# Altium PCB UAC.PcbDoc
Units mm, origin at the board's own origin, x right, y up, seen from the top; angles counter-clockwise.
Board outline 27.3 x 30.48 mm, 2 copper layers (Top Layer, Bottom Layer), stack 1.57 mm thick; 29 components, 25 nets, 197 pads, 47 vias.
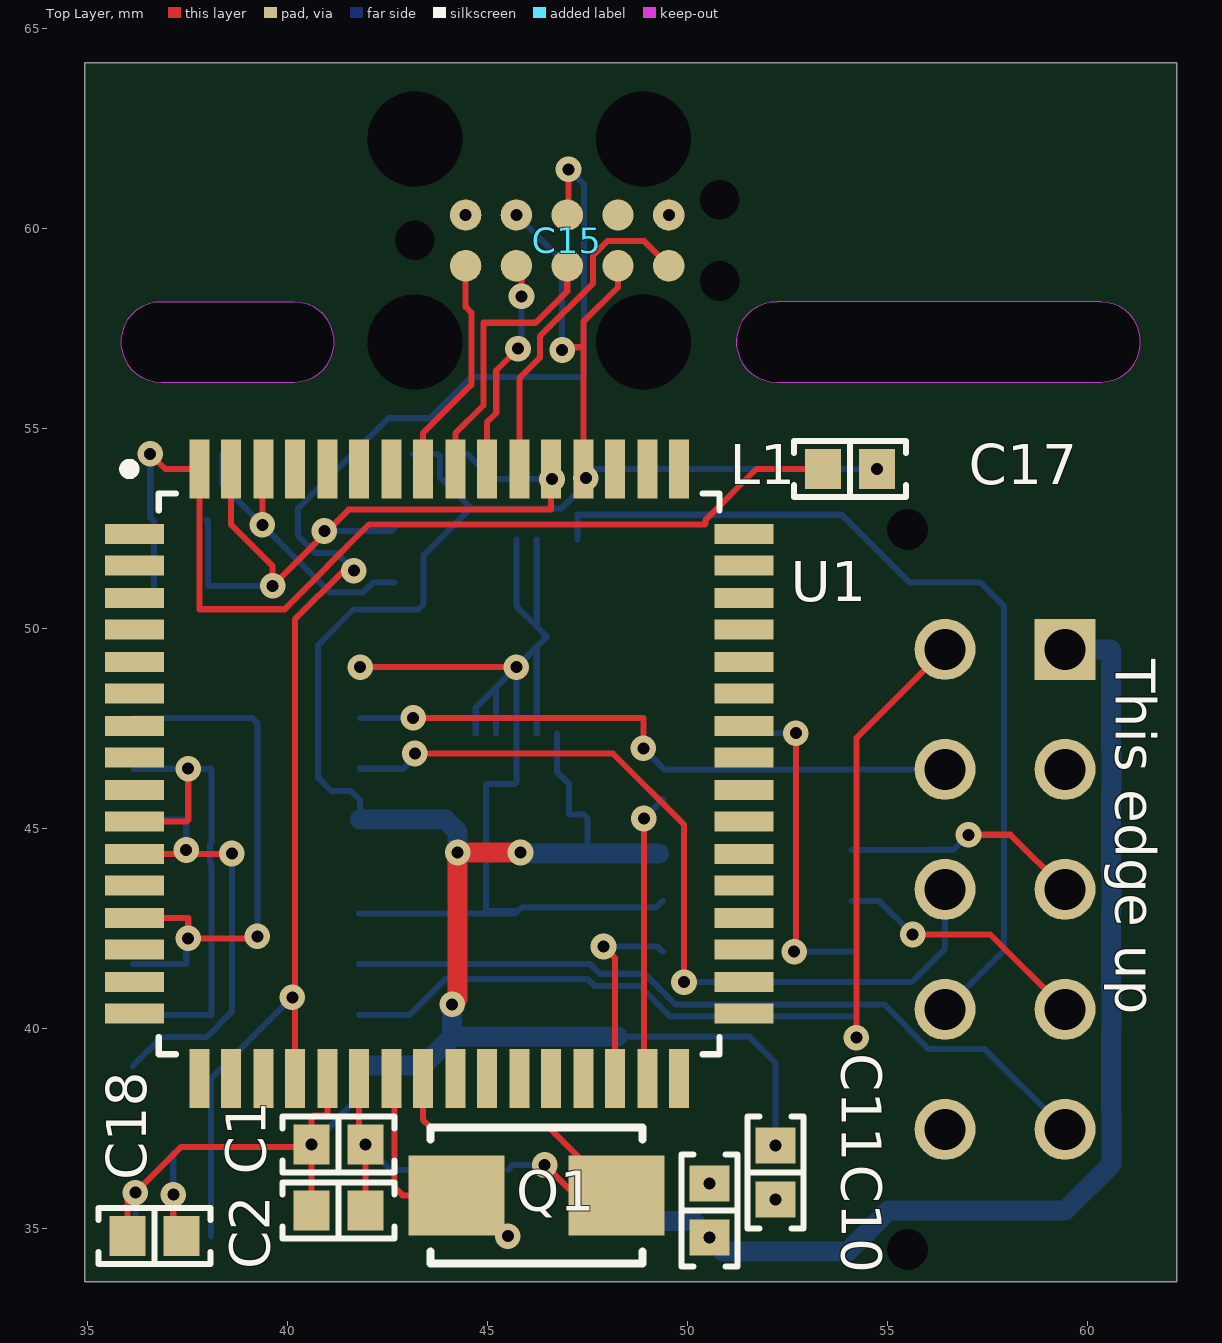
[diagram p0: Top Layer view]
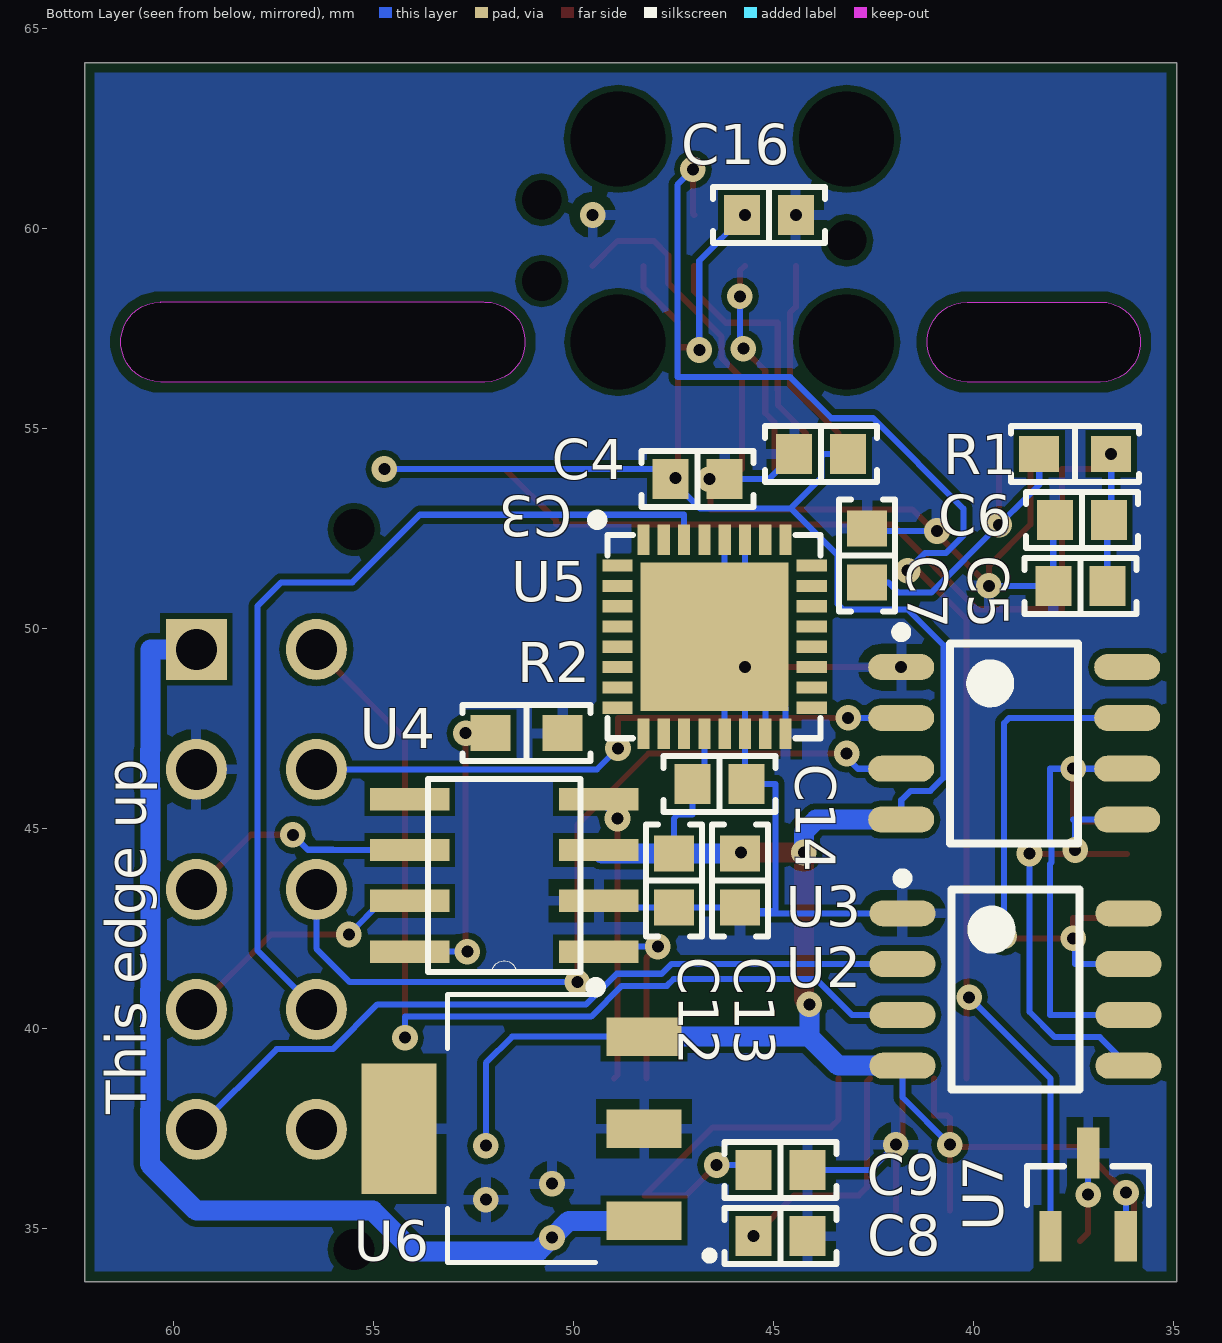
[diagram p1: Bottom Layer view, seen from below]
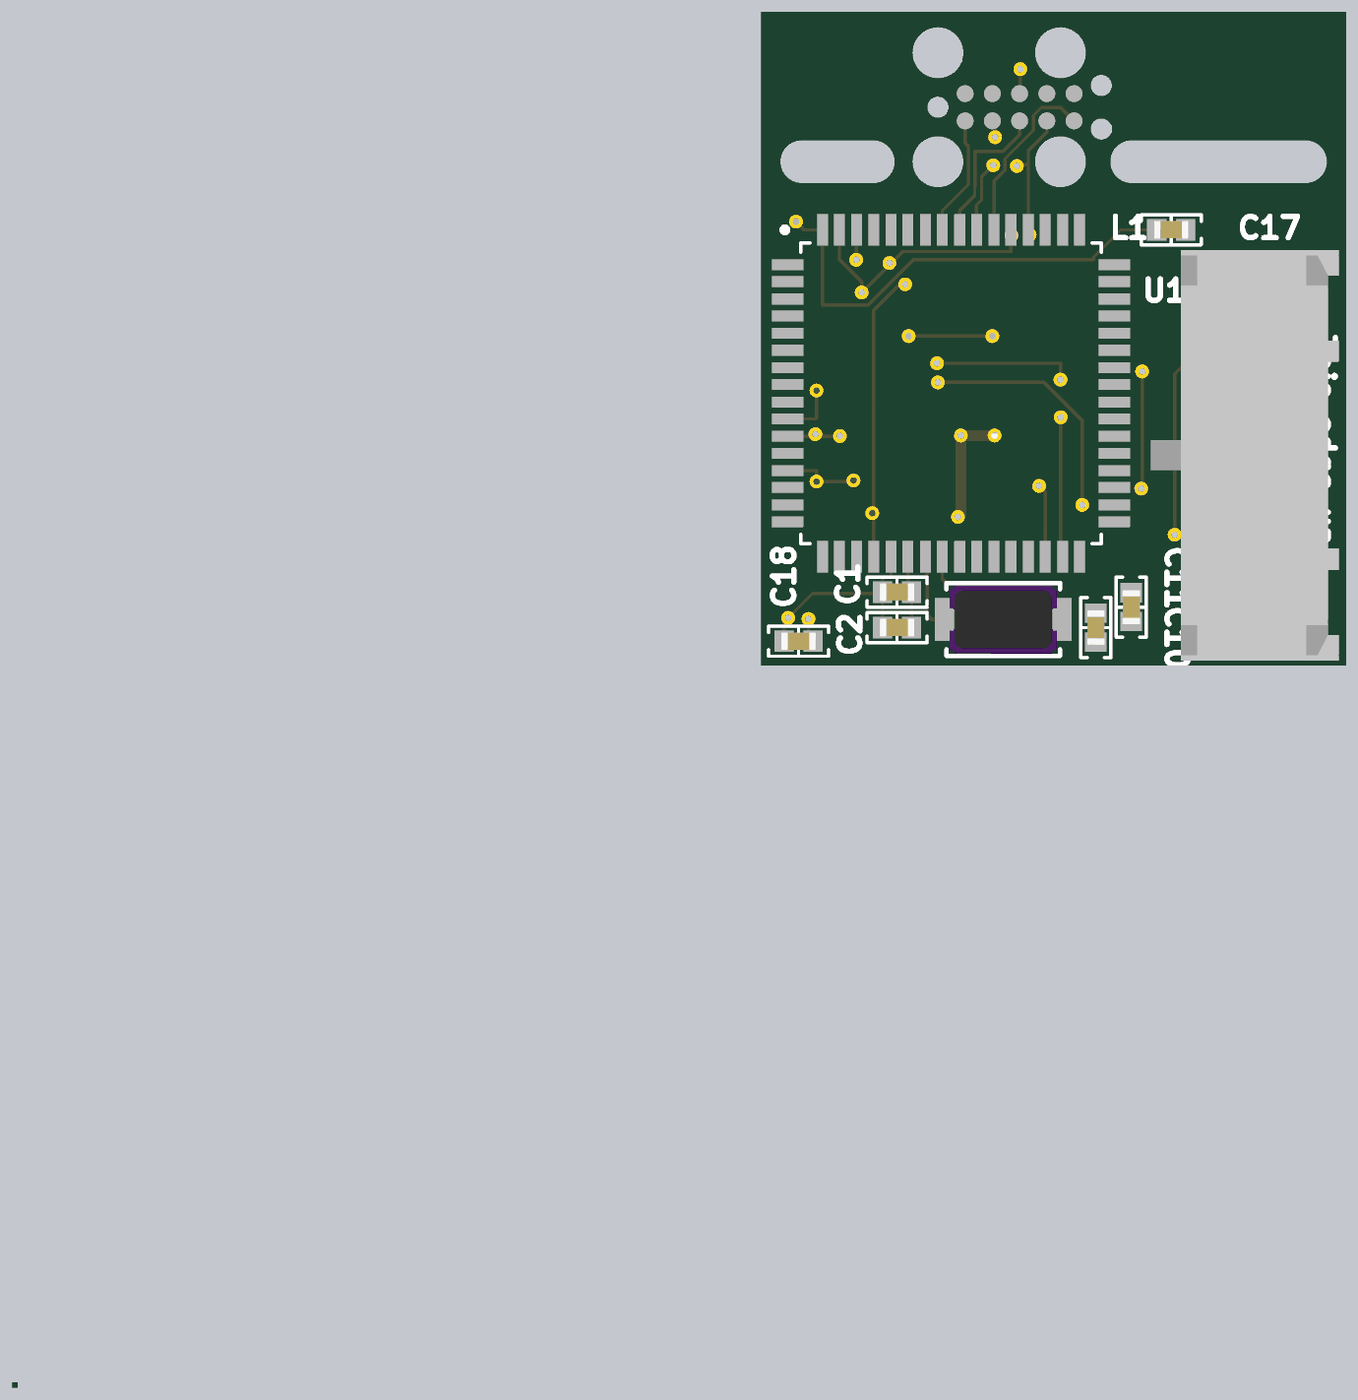
[diagram p2: 3D render of the assembled board from above, using the file's embedded part models]
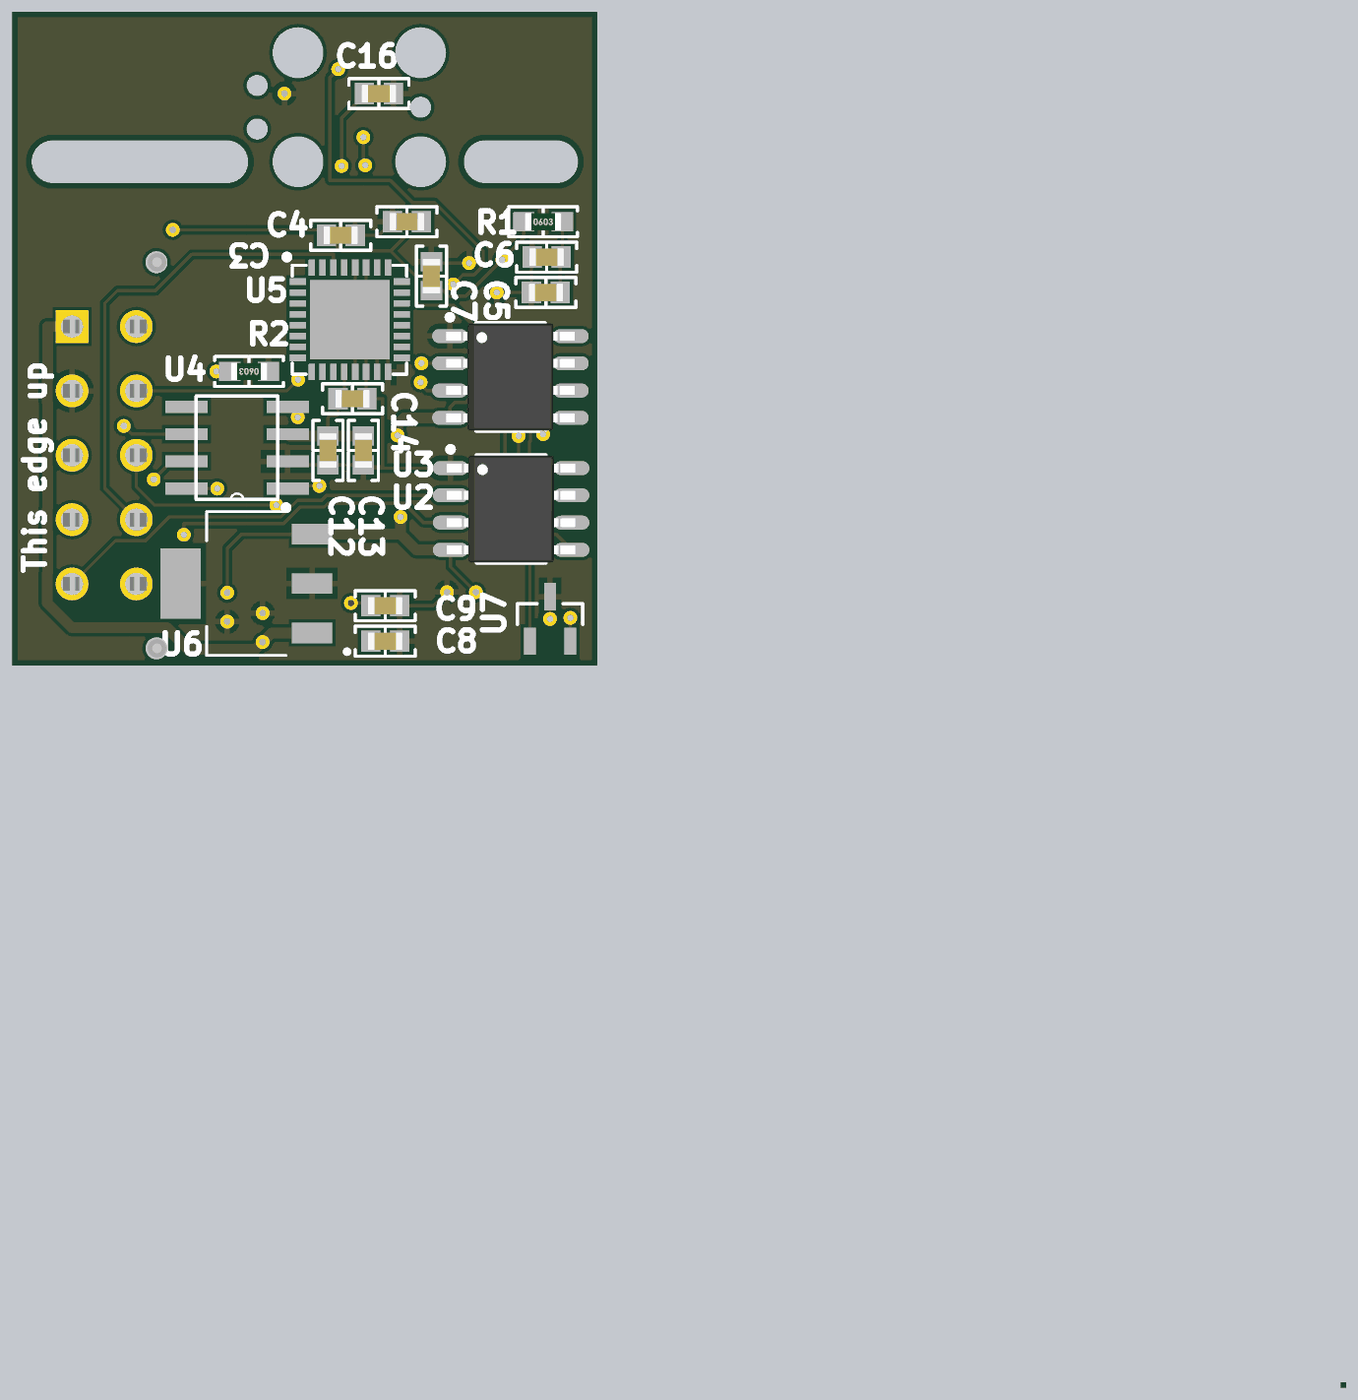
[diagram p3: 3D render of the assembled board from below, using the file's embedded part models]

## Layer stack, top to bottom
Top Solder: solder mask 0.015, Solder Resist, Dk 3.5
Top Layer: signal copper 0.035
Dielectric 1: dielectric 1.5, FR-4, Dk 4.8
Bottom Layer: signal copper 0.035
Bottom Solder: solder mask 0.015, Solder Resist, Dk 3.5

## Board outline
34.925,33.655 34.925,64.135 62.23,64.135 62.23,33.655
cut-out: 36.839,56.15 40.165,56.15 ccw(c40.165,57.15) 40.165,58.15 36.842,58.15 ccw(c36.83,57.15)
cut-out: 52.226,56.15 60.325,56.15 ccw(c60.325,57.15) 60.325,58.15 60.325,58.151 52.246,58.151 52.229,58.15 ccw(c52.217,57.15)
cut-out: 0,0 0.254,0 0.254,0.254 0,0.254

## Design rules (kind name [scope] priority, off if disabled: settings)
AcuteAngle [All] p1: minimum=4.50000000000000E+0001 checktracksonly=FALSE
BoardOutlineClearance [All] p1: gap=0.254 ignorepadtopadclearanceinfootprint=FALSE
Clearance [All] p1: gap=0.152 ignorepadtopadclearanceinfootprint=FALSE
ComponentClearance [All] p1: gap=0.1 collisioncheckmode=3 verticalgap=0.254 showdistances=FALSE
FanoutControl Fanout_Small [All] p1 off: bgadir=Out bgaviamode=Centered fanoutstyle=Auto fanoutdirection=Alternating viagrid=0.025 // Protel DXP Scope 1 Expression Was: (CompPinCount < 5)   Fanout_Small (Default Rule)
FanoutControl Fanout_Default [All] p2: bgadir=Out bgaviamode=Centered fanoutstyle=Auto fanoutdirection=Alternating viagrid=0.025 // Fanout_Default (Default Rule)
FanoutControl Fanout_SOIC [All] p3 off: bgadir=Out bgaviamode=Centered fanoutstyle=Auto fanoutdirection=Alternating viagrid=0.025 // Protel DXP Scope 1 Expression Was: IsSOIC   Fanout_SOIC (Default Rule)
FanoutControl Fanout_BGA [All] p4 off: bgadir=Out bgaviamode=Centered fanoutstyle=Auto fanoutdirection=Alternating viagrid=0.025 // Protel DXP Scope 1 Expression Was: IsBGA   Fanout_BGA (Default Rule)
FanoutControl Fanout_LCC [All] p5 off: bgadir=Out bgaviamode=Centered fanoutstyle=Auto fanoutdirection=Alternating viagrid=0.025 // Protel DXP Scope 1 Expression Was: IsLCC   Fanout_LCC (Default Rule)
HoleSize [All] p1: absolutevalues=TRUE maxlimit=7 minlimit=0.2 maxpercent=80.000 minpercent=20.000
MinimumAnnularRing [All] p1: minimumring=0.17
PolygonConnect [All] p1: connectstyle=Relief reliefconductorwidth=0.254 reliefentries=4 polygonreliefangle="90 Angle" airgapwidth=0.254
RoutingVias [All] p1: holewidth=0.3 width=0.64 viastyle="Through Hole" minholewidth=0.3 minwidth=0.61 maxholewidth=0.711 maxwidth=1.27
SMDEntry [All] p1 off: side=TRUE corner=TRUE anyangle=FALSE // Protel DXP Scope 1 Expression Was: not IsRoundPad
SMDToCorner [All] p1: distance=60000
SilkToSolderMaskClearance [All] p1 off: minsilkscreentomaskgap=0.254 clearancetoexposedcopper=TRUE // Protel DXP Scope 1 Expression Was: IsPad
SolderMaskExpansion [All] p1: expansion=0
Width [All] p1: maxlimit=1.219 minlimit=0.152 preferedwidth=0.305
22 further rules are at their usual default settings.

## Components (designator, comment, footprint, x,y, rotation, side; value= is the part's Value field where it differs from the comment)
C1 "SMD Capacitor" "CAP 0603/1608" 41.275,37.084 r180 top value=1uF
C2 "SMD Capacitor" "CAP 0603/1608" 41.275,35.433 r180 top value=100nF
C3 "SMD Capacitor" "CAP 0603/1608" 46.903,53.721 r0 bottom value=1uF
C4 "SMD Capacitor" "CAP 0603/1608" 43.815,54.355 r180 bottom value=100nF
C5 "SMD Capacitor" "CAP 0603/1608" 37.338,51.054 r0 bottom value=1uF
C6 "SMD Capacitor" "CAP 0603/1608" 37.298,52.704 r0 bottom value=100nF
C7 "SMD Capacitor" "CAP 0603/1608" 42.672,51.816 r90 bottom value=1uF
C8 "SMD Capacitor" "CAP 0603/1608" 44.831,34.798 r0 bottom value=18pF
C9 "SMD Capacitor" "CAP 0603/1608" 44.831,36.449 r0 bottom value=18pF
C10 "SMD Capacitor" "CAP 0603/1608" 50.546,35.433 r270 top value=2u2
C11 "SMD Capacitor" "CAP 0603/1608" 52.197,36.384 r90 top value=1uF
C12 "SMD Capacitor" "CAP 0603/1608" 47.498,43.688 r90 bottom value=100nF
C13 "SMD Capacitor" "CAP 0603/1608" 45.847,43.688 r90 bottom value=1uF
C14 "SMD Capacitor" "CAP 0603/1608" 46.355,46.101 r180 bottom value=1uF
C15 "JTAG" SEGGER_10_PIN 43.18,59.69 r0 top
C16 "SMD Capacitor" "CAP 0603/1608" 45.125,60.325 r180 bottom value=100nF
C17 "43045-1012" 43045-1012 59.436,43.465 r90 top
C18 "SMD Capacitor" "CAP 0603/1608" 36.679,34.799 r0 top value=1uF
L1 "SMD Capacitor" "CAP 0603/1608" 54.062,53.975 r0 top value=100nH
Q1 "16M" "NDK NX5032GA" 46.228,35.814 r180 top
R1 "SMD Resistor" "STACKPOLE CSR0603" 37.465,54.355 r180 bottom value=100
R2 "SMD Resistor" "STACKPOLE CSR0603" 51.181,47.371 r0 bottom value=10k
U1 "AT90CAN128-16AI" *QFP80P1600X1600X120-64N 43.79,46.355 r0 top
U2 "MAX31855KASA+" SOIC8 38.958,40.962 r180 bottom value=Value
U3 "MAX31855KASA+" SOIC8 38.989,47.117 r180 bottom value=Value
U4 "MCP2551-I/SN" *SOIC127P600X175-8N 51.74,43.815 r0 bottom
U5 "ADXL1001/2" PCBComponent_1 48.908,51.562 r180 bottom
U6 "LT1118CST-5" *SOT230P700X180-4N 51.308,37.484 r0 bottom
U7 "MCP130T-450I/TT" *SOT95P237X112-3N 37.142,35.833 r180 bottom

## Footprints (in the part's own frame and the unit in brackets; to place one, negate y for a bottom-side part, rotate by r counter-clockwise, add the part's x,y. Pads: shape width x height; smd on the part's side, far side on the other; paste and mask are expansions set on the pad)
43045-1012 [mm]
  rect 1.524x1.524 hole 1.02: 1(6,0)
  round 1.524 hole 1.02: 2(3,0) 3(0,0) 4(-3,0) 5(-6,0) 6(6,3) 7(3,3) 8(0,3) 9(-3,3) 10(-6,3)
  round 0 hole 1.02 unplated: ""(-9,3.94) ""(9,3.94)
  body extent -9.58,-2.45 9.58,6.32, height 9.95
*QFP80P1600X1600X120-64N [mil]
  rect 58x20 smd: 1(-300,236) 2(-300,205) 3(-300,173) 4(-300,142) 5(-300,110) 6(-300,79) 7(-300,47) 8(-300,16) 9(-300,-16) 10(-300,-47) 11(-300,-79) 12(-300,-110) 13(-300,-142) 14(-300,-173) 15(-300,-205) 16(-300,-236) 33(300,-236) 34(300,-205) 35(300,-173) 36(300,-142) 37(300,-110) 38(300,-79) 39(300,-47) 40(300,-16) 41(300,16) 42(300,47) 43(300,79) 44(300,110) 45(300,142) 46(300,173) 47(300,205) 48(300,236)
  rect 20x58 smd: 17(-236,-300) 18(-205,-300) 19(-173,-300) 20(-142,-300) 21(-110,-300) 22(-79,-300) 23(-47,-300) 24(-16,-300) 25(16,-300) 26(47,-300) 27(79,-300) 28(110,-300) 29(142,-300) 30(173,-300) 31(205,-300) 32(236,-300) 49(236,300) 50(205,300) 51(173,300) 52(142,300) 53(110,300) 54(79,300) 55(47,300) 56(16,300) 57(-16,300) 58(-47,300) 59(-79,300) 60(-110,300) 61(-142,300) 62(-173,300) 63(-205,300) 64(-236,300)
  silkscreen extent -310,-276 276,305, body extent -270,-270 270,270, height 30
*SOIC127P600X175-8N [mil]
  rect 78x22 smd: 1(-93,75) 2(-93,25) 3(-93,-25) 4(-93,-75) 5(93,-75) 6(93,-25) 7(93,25) 8(93,75)
  silkscreen extent -95,-95 75,115, body extent -75,-95 75,95, height 80
*SOT95P237X112-3N [mil]
  rect 22x50 smd: 1(-37,-41) 2(37,-41) 3(0,41)
  silkscreen extent -60,-10 60,28, body extent -60,-25 60,25, height 50
*SOT230P700X180-4N [mm]
  rect 1.88x0.96 smd: 1(-3.065,2.3) 2(-3.065,0) 3(-3.065,-2.3)
  rect 1.88x3.26 smd: 2(3.065,0)
  silkscreen extent -4.8,-3.35 1.85,3.35, body extent -1.91,-3.43 1.91,3.43, height 1.27
"CAP 0603/1608" [mm] "Chip Capacitor, 2-Leads, Body 1.60x0.80mm, IPC Medium Density"
  rect 0.9x1 smd: 1(-0.675,0) 2(0.675,0)
  silkscreen extent -1.4,-0.7 1.4,0.7, body extent -0.8,-0.41 0.8,0.41, height 0.82
"NDK NX5032GA" [mm] "Crystal, 2-Leads, Body 5.00x3.20mm, IPC Medium Density"
  rect 2.4x2 smd: 1(-2,0) 2(2,0)
  silkscreen extent -2.65,-1.7 2.65,1.7, body extent -2.5,-1.6 2.5,1.6, height 1.2
PCBComponent_1 [mil]
  rect 30x12 smd: 1(0,0) 2(0,-20) 3(0,-40) 4(0,-60) 5(0,-80) 6(0,-100) 7(0,-120) 8(0,-140) 17(191,-140) 18(191,-120) 19(191,-100) 20(191,-80) 21(191,-60) 22(191,-40) 23(191,-20) 24(191,0)
  rect 12x30 smd: 9(25.5,-165.5) 10(45.5,-165.5) 11(65.5,-165.5) 12(85.5,-165.5) 13(105.5,-165.5) 13(105.5,25.5) 13(125.5,-165.5) 13(125.5,25.5) 15(145.5,-165.5) 16(165.5,-165.5) 25(165.5,25.5) 26(145.5,25.5) 29(85.5,25.5) 30(65.5,25.5) 31(45.5,25.5) 32(25.5,25.5)
  rect 146x146 smd: 13(95.5,-70)
  silkscreen extent -25,-170 200,50, body extent -10,-167 198,35, height 10
SEGGER_10_PIN [mm]
  round 0.787 smd: 1(1.27,-0.635) 2(2.54,-0.635) 3(3.81,-0.635) 4(5.08,-0.635) 5(6.35,-0.635) 6(6.35,0.635) 7(5.08,0.635) 8(3.81,0.635) 9(2.54,0.635) 10(1.27,0.635)
  round 0 hole 2.375 unplated: ""(0,-2.54) ""(0,2.54) ""(5.715,-2.54) ""(5.715,2.54)
  round 0 hole 0.991 unplated: ""(0,0) ""(7.62,-1.015) ""(7.62,1.015)
SOIC8 [mm] "SOIC, 8-Leads, Body 4,90x3,90mm, Pitch 1,27mm, IPC Low Density"
  oval 1.65x0.65 smd: 1(-2.825,1.905) 2(-2.825,0.635) 3(-2.825,-0.635) 4(-2.825,-1.905) 5(2.825,-1.905) 6(2.825,-0.635) 7(2.825,0.635) 8(2.825,1.905)
  silkscreen extent -2.95,-2.5 1.6,2.9, body extent -3,-2.5 3,2.5, height 1.75
"STACKPOLE CSR0603" [mm] "Chip Resistor, 2-Leads, Body 1.60x0.80mm, IPC Medium Density"
  rect 1x0.9 smd: 1(-0.9,0) 2(0.9,0)
  silkscreen extent -1.6,-0.7 1.6,0.7, body extent -0.85,-0.4 0.85,0.4, height 0.45

## Part data
C1 C2 C3 C4 C5 C6 C7 C8 C9 C10 C11 C12 C13 C14 C16 C18 L1: "Capacitor with multiple Footprints"
C15: library part "Segger 10-Pin"
C17: library part "MicroFit3.0 10-Pin", "Micro-Fit 3.0 10-Pin / 600V / 8.5A"
Q1: library part "16 MHz Quartz", "16 MHz Quartz"
R1 R2: "Resistor with multiple footprints"
U1: "Ic Mcu 8bit 128kb Flash 64tqfp", Package="TQFP-64 Microchip", Availability=Unavailable, MF=Microchip, MP=AT90CAN128-16AI, Price=None, SnapEDA_Link=https://www.snapeda.com/parts/AT90CAN128-16AI/Microchip/view-part/?ref=snap
U2 U3: "No Description Available", Built_By=EMA_UL_Team, Copyright="Copyright (C) 2018 Accelerated Designs. All rights reserved", Manufacturer_Part_Number=MAX31855KASA+, RefDes=RefDes, Type=DEV, Vendor="Maxim Integrated Products"
U4: "MCP2551 Series 5.5 V 1 Mb/s Surface Mount High-Speed CAN Transceiver - SOIC-8", Package="SOIC-8 Microchip", Availability=Unavailable, MF=Microchip, MP=MCP2551-I/SN, Price=None, SnapEDA_Link=https://www.snapeda.com/parts/MCP2551-I/SN/Microchip/view-part/?ref=snap
U6: "or UA78M if used topdown (in and out changed)"
U7: "System Supervisors - Power Supply Monitors with Reset Generators Open Drain Low", Package="SOT-23-3 Microchip", Availability=Unavailable, MF=Microchip, MP=MCP120T-450I/TT, Price=None, SnapEDA_Link=https://www.snapeda.com/parts/MCP120T-450I/TT/Microchip/view-part/?ref=snap

## Via types
v1: diameter 0.64, hole 0.3, Top Layer to Bottom Layer, 47 vias

## Nets (pads, with @x,y where several pads share a name; then routed paths per layer and width w, separated by ;. In a path a pad name is that pad's centre, name@x,y a point inside that pad or via, vN(x,y) a via of type N, cw(c..) or ccw(c..) an arc to the next point about the centre after c; other vN are vias at no path point)
+5V: C1.2 C2.2 C3.2 C4.2 C11.2 C12.2 C13.2 C14.1 C15.4 C15.9 C16.1 C18.1 L1.2 U1.21 U1.52 U2.4 U3.4 U4.3 U5.12 U6.3 U7.2 | length 77.4
  Top Layer w0.152: C18.1@35.997,34.671 35.997,35.686 v1(36.195,35.884) 37.332,37.021 40.537,37.021 v1(40.6,37.084) ; C2.2 v1(40.6,37.084) ; U1.21 40.996,37.809 40.665,37.809 40.6,37.744 v1(40.6,37.084) ; v1(46.863,56.951) 46.93,57.018 47.396,57.018 ; v1(47.457,53.746) 47.626,53.746 U1.52 47.396,57.018 ; C15.4 48.26,58.518 47.396,57.654 47.396,57.018
  Top Layer w0.5: v1(44.113,40.589) 44.25,40.726 v1(44.25,44.387) v1(45.823,44.387)
  Bottom Layer w0.152: v1(36.195,35.884) 36.195,34.799 U7.2 ; v1(40.6,37.084) 41.783,38.267 U2.4 ; U3.4 41.814,45.696 41.581,45.928 41.085,45.928 40.76,46.253 40.76,49.576 41.647,50.462 43.267,50.462 43.401,50.596 43.401,51.814 44.579,52.992 ; C4.2 43.742,54.354 43.811,54.286 43.811,53.76 44.579,52.992 ; v1(45.72,60.325) 46.863,59.182 v1(46.863,56.951) ; v1(45.823,44.387) C13.2 ; U5.12 46.736,46.395 C14.1 47.03,45.339 47.396,45.339 47.498,45.237 C12.2 ; v1(47.457,53.746) 47.457,53.959 47.474,53.975 v1(54.737,53.975) ; C3.2 46.849,52.992 44.579,52.992 ; U6.3 51.54,39.784 52.197,39.127 v1(52.197,37.059) ; U4.3@49.291,44.363 U4.3
  Bottom Layer w0.5: U2.4 43.386,39.057 44.113,39.784 ; U3.4 43.942,45.212 44.25,44.904 v1(44.25,44.387) ; v1(44.113,40.589) 44.113,39.784 ; C13.2 C12.2 ; C12.2 U4.3@49.291,44.363 ; U6.3 44.113,39.784
+12V: C10.2 C17.1 U6.1 | length 27.7
  Bottom Layer w0.152: U6.1 U6.1@48.248,35.179
  Bottom Layer w0.5: U6.1@48.248,35.179 50.125,35.179 v1(50.546,34.758) 50.887,34.417 54.008,34.417 55.024,35.433 59.436,35.433 60.6,36.597 60.6,37.947 60.579,37.969 60.579,39.961 60.6,39.983 60.6,40.947 60.579,40.969 60.579,42.961 60.6,42.983 60.6,43.947 60.579,43.969 60.579,45.961 60.6,45.983 60.6,46.947 60.579,46.969 60.579,49.465 C17.1
GND: C1.1 C2.1 C3.1 C4.1 C5.2 C6.2 C7.2 C8.1 C9.1 C10.1 C11.1 C12.1 C13.1 C14.2 C15.6 C15.10 C16.2 C17.2 C18.2 R2.1 U1.22 U1.53 U1.63 U2.1 U3.1 U4.2 U5.13 U5.15 U5.16 U6.2 U7.3 | length 58.4
  Top Layer w0.152: v1(37.142,35.833) 37.142,34.876 C18.2@37.347,34.671 ; U1.63 38.583,52.59 39.624,51.548 v1(39.624,51.054) 41.529,52.959 46.584,52.959 U1.53 ; U1.22 41.783,37.251 v1(41.95,37.084) C2.1 ; v1(41.814,49.022) v1(45.72,49.022)
  Bottom Layer w0.152: v1(37.142,35.833) U7.3 ; C6.2 38.013,52.664 C5.2 v1(39.624,51.054) ; v1(40.919,52.426) 42.607,52.426 C7.2 ; U2.1 45.701,42.867 C13.1@45.76,42.926 ; v1(41.95,37.084) 42.585,36.449 C9.1 ; C4.1 45.123,53.721 C3.1 v1(46.609,53.721) ; U5.16 44.704,48.006 U5.13@45.212,48.514 ; U5.15 U5.13@45.212,48.514 ; U5.13@45.72,52.21 45.72,50.546 U5.13@46.228,50.038 ; U5.13@46.228,47.358 U5.13@46.228,49.53 ; U5.13@46.228,52.21 U5.13@46.228,50.038 ; U4.2 49.211,43.013 C12.1 C13.1 C13.1@45.76,42.926 ; U5.13@45.212,48.514 v1(45.72,49.022) ; v1(45.72,49.022) 45.72,47.358 45.72,46.141 C14.2 44.958,46.101 44.958,42.926 C13.1@45.76,42.926 ; v1(45.72,49.022) U5.13@46.228,49.53 ; U5.13@46.228,49.53 46.482,49.784 U5.13@46.228,50.038
  other v1: 52.197,35.709 50.546,36.108 44.45,60.325 49.53,60.325
NetC7_1: C7.1 R1.1 U1.62 | length 7.7
  Top Layer w0.152: v1(39.37,52.578) 39.37,53.95 U1.62
  Bottom Layer w0.152: R1.1 38.365,53.586 38.652,53.299 38.652,53.296 v1(39.37,52.578) 41.062,50.886 41.883,50.886 42.138,51.141 C7.1
NetC8_2: C8.2 Q1.2 U1.23 | length 6.1
  Top Layer w0.152: U1.23 42.675,38.656 42.675,36.015 42.876,35.814 Q1.2 44.49,35.814 v1(45.506,34.798) v1@45.536,34.768
NetC9_2: C9.2 Q1.1 U1.24 | length 9.7
  Top Layer w0.152: U1.24 43.383,37.708 43.577,37.514 46.528,37.514 Q1.1 47.19,35.814 v1(46.428,36.576)
  Bottom Layer w0.152: C9.2 45.633,36.576 v1(46.428,36.576)
NetC15_1: C15.1 U1.57 | length 5.6
  Top Layer w0.152: U1.57 43.383,54.864 44.596,56.077 44.596,57.883 44.45,58.029 C15.1
NetC15_2: C15.2 U1.55 | length 5.5
  Top Layer w0.152: U1.55 44.983,55.143 45.215,55.375 45.215,56.438 v1(45.76,56.983) ; C15.2 45.847,58.928 v1(45.847,58.293)
  Bottom Layer w0.152: v1(45.76,56.983) 45.72,57.023 45.847,57.15 v1(45.847,58.293)
NetC15_3: C15.3 U1.56 | length 7
  Top Layer w0.152: U1.56 44.196,54.864 44.895,55.562 44.895,55.944 44.901,55.951 44.901,57.631 46.201,57.631 46.99,58.42 C15.3
NetC15_5: C15.5 U1.54 | length 8.4
  Top Layer w0.152: U1.54 45.796,56.243 46.309,56.756 46.309,57.288 47.638,58.618 47.638,59.313 48.002,59.677 48.908,59.677 C15.5
NetC15_8: C15.8 U1.20 U7.1 | length 37.8
  Top Layer w0.152: v1(40.118,40.767) v1@40.183,40.767 ; U1.20 v1@40.183,40.767 ; v1(41.656,51.435) 41.402,51.435 40.183,50.216 v1@40.183,40.767 ; C15.8 47.023,60.358 v1(47.023,61.468)
  Bottom Layer w0.152: U7.1 38.082,38.73 v1(40.118,40.767) ; v1(41.656,51.435) 41.214,51.877 40.692,51.877 40.259,52.31 40.259,52.986 42.518,55.245 43.558,55.245 44.585,56.272 47.412,56.272 47.412,61.079 v1(47.023,61.468)
NetC17_3: C17.3 U4.6 | length 6.1
  Top Layer w0.152: v1(57.023,44.831) 58.07,44.831 C17.3
  Bottom Layer w0.152: U4.6 56.02,44.45 56.026,44.456 56.648,44.456 v1(57.023,44.831)
NetC17_4: C17.4 U4.7 | length 6.5
  Top Layer w0.152: v1(55.626,42.338) 57.563,42.338 C17.4
  Bottom Layer w0.152: U4.7 54.784,43.18 v1(55.626,42.338)
NetC17_5: C17.5 U2.2 | length 19.4
  Bottom Layer w0.152: U2.2 47.562,41.597 47.803,41.356 48.927,41.356 49.694,40.589 54.911,40.589 56.026,39.474 57.427,39.474 C17.5
NetC17_6: C17.6 U2.3 | length 24.3
  Top Layer w0.152: v1(54.221,39.759) 54.221,47.25 C17.6
  Bottom Layer w0.152: U2.3 43.048,40.327 43.942,41.22 47.508,41.22 47.677,41.051 48.801,41.051 49.568,40.284 54.221,40.284 v1(54.221,39.759)
NetC17_7: C17.7 U3.2 | length 15.6
  Top Layer w0.152: v1(43.14,47.752) 48.895,47.752 v1(48.895,46.99)
  Bottom Layer w0.152: U3.2 v1(43.14,47.752) ; v1(48.895,46.99) 49.42,46.465 C17.7
NetC17_8: C17.8 U3.3 | length 21.6
  Top Layer w0.152: v1(43.18,46.863) 48.133,46.863 49.911,45.085 v1(49.911,41.148)
  Bottom Layer w0.152: U3.3 42.896,46.482 43.154,46.74 43.154,46.975 43.18,46.949 v1(43.18,46.863) ; v1(49.911,41.148) 55.601,41.148 56.436,41.983 C17.8
NetC17_9: C17.9 U5.30 | length 22.9
  Bottom Layer w0.152: U5.30 47.244,52.832 53.848,52.832 55.539,51.141 57.317,51.141 57.912,50.546 57.912,41.941 C17.9
NetR2_2: R2.2 U4.8 | length 7.6
  Top Layer w0.152: v1(52.662,41.91) 52.705,41.953 v1(52.705,47.371)
  Bottom Layer w0.152: R2.2 v1(52.705,47.371) v1@52.733,47.371 ; v1(52.662,41.91) U4.8
NetU1_10: U1.10 U2.6 U3.6 | length 12.7
  Top Layer w0.152: U1.10 37.465,45.161 37.516,45.212 v1(37.516,46.482)
  Bottom Layer w0.152: U2.6 38.1,40.327 38.1,44.095 38.059,44.136 38.059,44.59 38.1,44.631 38.1,46.482 v1(37.516,46.482) U3.6
NetU1_11: U1.11 U2.5 U3.5 | length 11.7
  Top Layer w0.152: U1.11 v1@37.465,44.348 ; v1(37.465,44.45) v1@37.465,44.348 ; v1(38.608,44.363) 38.593,44.348 v1@37.465,44.348
  Bottom Layer w0.152: U2.5 36.849,39.773 37.977,39.773 38.608,40.404 v1(38.608,44.363) ; U3.5 37.516,45.212 37.465,45.161 v1(37.465,44.45)
NetU1_13: U1.13 U2.7 U3.7 | length 14.1
  Top Layer w0.152: U1.13 37.516,42.748 v1(37.516,42.24) 39.192,42.24 v1(39.243,42.291)
  Bottom Layer w0.152: U2.7 37.465,41.597 37.465,42.189 v1(37.516,42.24) ; U3.7 39.116,47.752 39.243,47.625 v1(39.243,42.291)
NetU1_30: U1.30 U4.1 | length 5
  Top Layer w0.152: v1(47.898,42.037) 48.184,41.751 U1.30
  Bottom Layer w0.152: v1(47.898,42.037) 49.251,42.037 U4.1
NetU1_31: U1.31 U4.4 | length 7.2
  Top Layer w0.152: v1(48.908,45.237) 48.908,38.824 U1.31
  Bottom Layer w0.152: v1(48.908,45.237) 49.378,45.707 U4.4
VDDA: C5.1 C6.1 L1.1 R1.2 U1.64 | length 25.3
  Top Layer w0.152: v1(36.565,54.355) 36.945,53.975 U1.64 37.795,50.47 39.929,50.47 40.98,51.521 40.98,51.535 42.035,52.59 50.431,52.59 50.444,52.603 50.444,52.698 51.721,53.975 L1.1
  Bottom Layer w0.152: v1(36.565,54.355) 36.565,52.762 C6.1 36.663,52.664 C5.1
pads on no net: C15. C15.7 C17. C17.10 U1.1 U1.2 U1.3 U1.4 U1.5 U1.6 U1.7 U1.8 U1.9 U1.12 U1.14 U1.15 U1.16 U1.17 U1.18 U1.19 U1.25 U1.26 U1.27 U1.28 U1.29 U1.32 U1.33 U1.34 U1.35 U1.36 U1.37 U1.38 U1.39 U1.40 U1.41 U1.42 U1.43 U1.44 U1.45 U1.46 U1.47 U1.48 U1.49 U1.50 U1.51 U1.58 U1.59 U1.60 U1.61 U2.8 U3.8 U4.5 U5.1 U5.2 U5.3 U5.4 U5.5 U5.6 U5.7 U5.8 U5.9 U5.10 U5.11 U5.17 U5.18 U5.19 U5.20 U5.21 U5.22 U5.23 U5.24 U5.25 U5.26 U5.29 U5.31 U5.32

## Polygon pours and split planes (outlines as drawn)
GND on Bottom Layer "GND_L02_P006" (solid, remove dead copper, pour order 6): 34.925,64.135 34.925,33.655 62.23,33.655 62.23,64.135

## Silkscreen, mask and mechanical layers (free items; w line width, h text height)
Top Overlay:
  text "This edge up" at 60.706,49.217 h1 r270
Bottom Overlay:
  text "This edge up" at 60.706,37.846 h1 r270
Mechanical 13:
  lines w0.152: 52.229,58.15 ccw(c52.217,57.15) 52.226,56.15 60.325,56.15 ccw(c60.325,57.15) 60.325,58.15 ; 52.246,58.151 60.325,58.151 ; 34.925,33.655 34.925,64.135 62.23,64.135 62.23,33.655 34.925,33.655 ; 36.839,56.15 cw(c36.83,57.15) 36.842,58.15 40.165,58.15 cw(c40.165,57.15) 40.165,56.15 36.839,56.15